# Altium PCB PORTS.PcbDoc
Units mm, origin at the board's own origin, x right, y up, seen from the top; angles counter-clockwise.
Board outline 489 x 46 mm, 2 copper layers (Top Layer, Bottom Layer); 2 components, 2 nets, 76 pads, 0 vias.
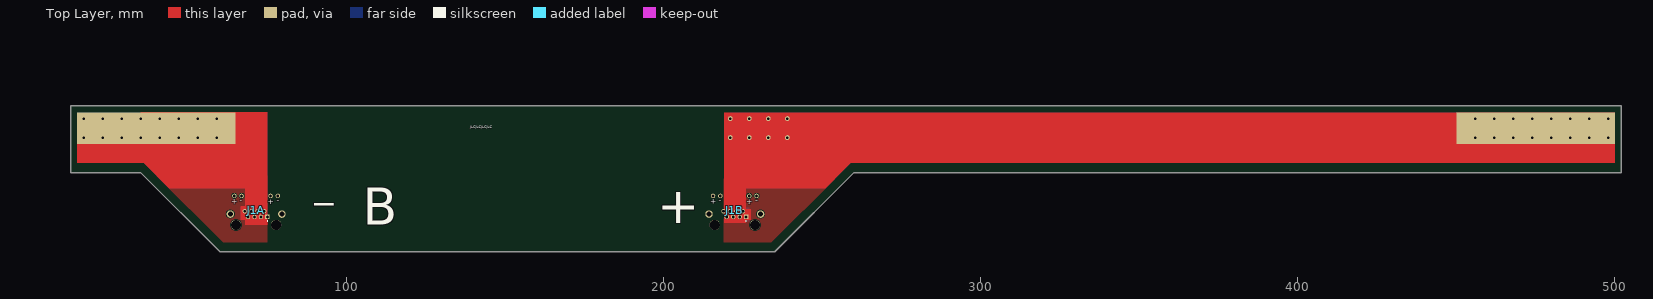
[diagram p0: Top Layer view]
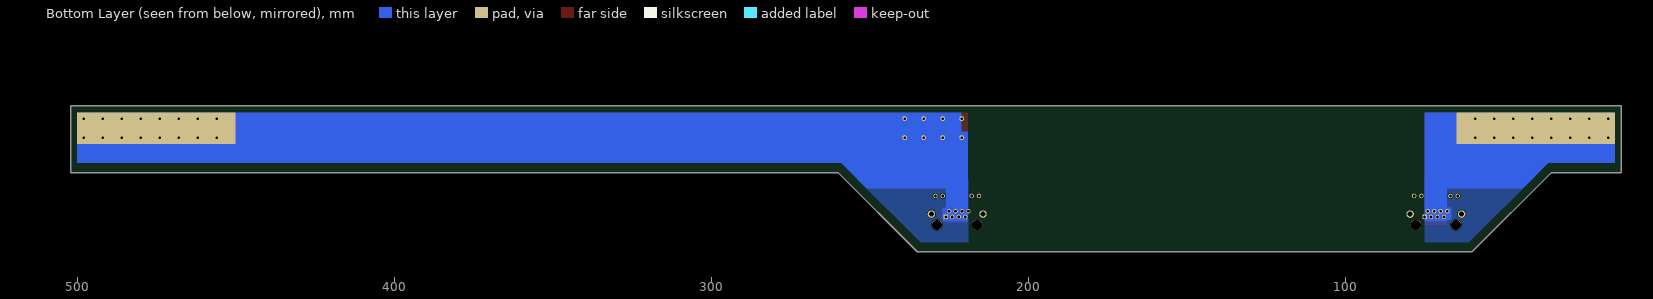
[diagram p1: Bottom Layer view, seen from below]

## Layer stack, top to bottom
Top Solder: solder mask 0.0102, Solder Resist, Dk 3.5
Top Layer: signal copper 0.0356
Dielectric 1: dielectric 0.32, FR-4, Dk 4.8
Bottom Layer: signal copper 0.0356
Bottom Solder: solder mask 0.0102, Solder Resist, Dk 3.5

## Board outline
13,34 35,34 60,9 235,9 260,34 502,34 502,55 13,55

## Design rules (kind name [scope] priority, off if disabled: settings)
Clearance [All] p1: gap=0.1 ignorepadtopadclearanceinfootprint=FALSE except(0.2: THPad-Fill THPad-Poly THPad-Region)
PolygonConnect [All] p1: connectstyle=Relief reliefconductorwidth=0.254 reliefentries=4 polygonreliefangle="90 Angle" airgapwidth=0.254
RoutingVias [All] p1: holewidth=0.711 width=1.27 viastyle="Through Hole" minholewidth=0.711 minwidth=1.27 maxholewidth=0.711 maxwidth=1.27
SolderMaskExpansion [All] p1: expansion=0.102
Width [All] p1: maxlimit=0.254 minlimit=0.254 preferedwidth=0.254
30 further rules are at their usual default settings.

## Components (designator, comment, footprint, x,y, rotation, side; value= is the part's Value field where it differs from the comment)
J1A "2-406549-1" TE_2-406549-1 75,20 r0 top
J1B "2-406549-1" TE_2-406549-1 226,20 r0 top

## Footprints (in the part's own frame and the unit in brackets; to place one, negate y for a bottom-side part, rotate by r counter-clockwise, add the part's x,y. Pads: shape width x height; smd on the part's side, far side on the other; paste and mask are expansions set on the pad)
TE_2-406549-1 [mm]
  rect 1.398x1.398 hole 0.89: 1(0,0)
  round 1.398 hole 0.89: 2(-1.02,1.78) 3(-2.04,0) 4(-3.06,1.78) 5(-4.08,0) 6(-5.1,1.78) 7(-6.12,0) 8(-7.14,1.78) 9(3.28,6.61) 10(0.99,6.61) 11(-8.15,6.61) 12(-10.44,6.61)
  round 2.355 hole 1.57: S1(-11.71,0.89) S2(4.55,0.89)
  round 3.25 hole 3.25 unplated: ""(-9.93,-2.54) ""(2.77,-2.54)
  silkscreen extent -0.12,-1.37 0.08,-1.17, body extent -12.9,-8.76 5.74,7.96, height 14.6

## Part data
J1A J1B: "J - JACK - ETHERNET - Right - THT", JLC Availability=Extended, LCSC Part #=C125068

## Free pads (board coordinates)
  rect 50x10 smd: 5(40,48) 5(475,48)
  rect 50x10 smd far side: 5(40,48) 5(475,48)
  round 1.524 hole 0.762: 6(17,45) 6(17,51) 6(23,45) 6(23,51) 6(29,45) 6(29,51) 6(35,45) 6(35,51) 6(41,45) 6(41,51) 6(47,45) 6(47,51) 6(53,45) 6(53,51) 6(59,45) 6(59,51) 6(221,45) 6(221,51) 6(227,45) 6(227,51) 6(233,45) 6(233,51) 6(239,45) 6(239,51) 6(456,45) 6(456,51) 6(462,45) 6(462,51) 6(468,45) 6(468,51) 6(474,45) 6(474,51) 6(480,45) 6(480,51) 6(486,45) 6(486,51) 6(492,45) 6(492,51) 6(498,45) 6(498,51)

## Nets (pads, with @x,y where several pads share a name; then routed paths per layer and width w, separated by ;. In a path a pad name is that pad's centre, name@x,y a point inside that pad or via, vN(x,y) a via of type N, cw(c..) or ccw(c..) an arc to the next point about the centre after c; other vN are vias at no path point)
SOL_1A: J1A.1 J1A.2 J1A.3 J1A.4 J1A.5 J1A.6 J1A.7 J1A.8 pad.5@40,48 pad.6@17,45 pad.6@17,51 pad.6@23,45 pad.6@23,51 pad.6@29,45 pad.6@29,51 pad.6@35,45 pad.6@35,51 pad.6@41,45 pad.6@41,51 pad.6@47,45 pad.6@47,51 pad.6@53,45 pad.6@53,51 pad.6@59,45 pad.6@59,51
SOL_1B: J1B.1 J1B.2 J1B.3 J1B.4 J1B.5 J1B.6 J1B.7 J1B.8 pad.5@475,48 pad.6@221,45 pad.6@221,51 pad.6@227,45 pad.6@227,51 pad.6@233,45 pad.6@233,51 pad.6@239,45 pad.6@239,51 pad.6@456,45 pad.6@456,51 pad.6@462,45 pad.6@462,51 pad.6@468,45 pad.6@468,51 pad.6@474,45 pad.6@474,51 pad.6@480,45 pad.6@480,51 pad.6@486,45 pad.6@486,51 pad.6@492,45 pad.6@492,51 pad.6@498,45 pad.6@498,51
pads on no net: J1A. J1A.9 J1A.10 J1A.11 J1A.12 J1A.S1 J1A.S2 J1B. J1B.9 J1B.10 J1B.11 J1B.12 J1B.S1 J1B.S2
copper on no net: | length 0
  Top Layer w0.254: 226.992,26.9 227,26.9

## Polygon pours and split planes (outlines as drawn)
SOL_1B on Top Layer "Top Layer-SOL_1B" (solid, pour order 6): 219,12 234,12 254,32 219,32
SOL_1A on Top Layer "Top Layer-SOL_1A" (solid, pour order 0): 75,12 61,12 40,33 75,33
SOL_1B on Bottom Layer "Bottom Layer-SOL_1B" (solid, pour order 4): 219,12 234,12 254,32 219,32
SOL_1A on Bottom Layer "Bottom Layer-SOL_1A" (solid, pour order 2): 75,12 61,12 40,33 75,33

## Other copper
Top Layer:
  rectangle net SOL_1B: 219.5,19 227.5,22.5
  rectangle net SOL_1A: 66.5,19 73,23.5
  rectangle net SOL_1B: 219,18 226,47
  region net SOL_1B: 219,53 219,37 500,37 500,53
  rectangle net SOL_1A: 68,17.5 75,47
  region net SOL_1A: 75,37 75,47 15,47 15,37
  region net SOL_1B: 260,38 251,29 222,29 222,47 260,47
  region net SOL_1A: 35,38 44,29 75,29 75,53 35,53
Bottom Layer:
  rectangle net SOL_1B: 219,18.5 227,23
  rectangle net SOL_1A: 66.5,19 71,23
  rectangle net SOL_1B: 219,18.5 226,47
  region net SOL_1B: 221,53 221,37 500,37 500,53
  rectangle net SOL_1A: 68,18.5 75,47
  region net SOL_1A: 75,37 75,53 15,53 15,37
  region net SOL_1B: 260,38 251,29 222,29 222,47 260,47
  region net SOL_1A: 35,38 44,29 75,29 75,47 35,47

## Silkscreen, mask and mechanical layers (free items; w line width, h text height)
Top Overlay:
  text "JLCJLCJLCJLC" at 139,48 h0.8
  text "-" at 89,16 h20
  text "-" at 91,16 h20
  text "+" at 198,14 h20
  text "B" at 105,13.54 h20
Board Outline (M30):
  lines w0.1: 13,34 35,34 60,9 235,9 260,34 502,34 502,55 13,55 13,47 13,34

## Text inside footprints (layer, text, board x,y; h text height)
J1A: Top Overlay "+" at 63.657,24.071 h1.78; Top Overlay "+" at 75.103,24.066 h1.78; Top Overlay "-" at 66.334,24.322 h1.78; Top Overlay "-" at 77.899,24.322 h1.78
J1B: Top Overlay "+" at 214.657,24.071 h1.78; Top Overlay "+" at 226.103,24.066 h1.78; Top Overlay "-" at 217.334,24.322 h1.78; Top Overlay "-" at 228.899,24.322 h1.78